# EAGLE board schematic_var2 (EAGLE 6.4)
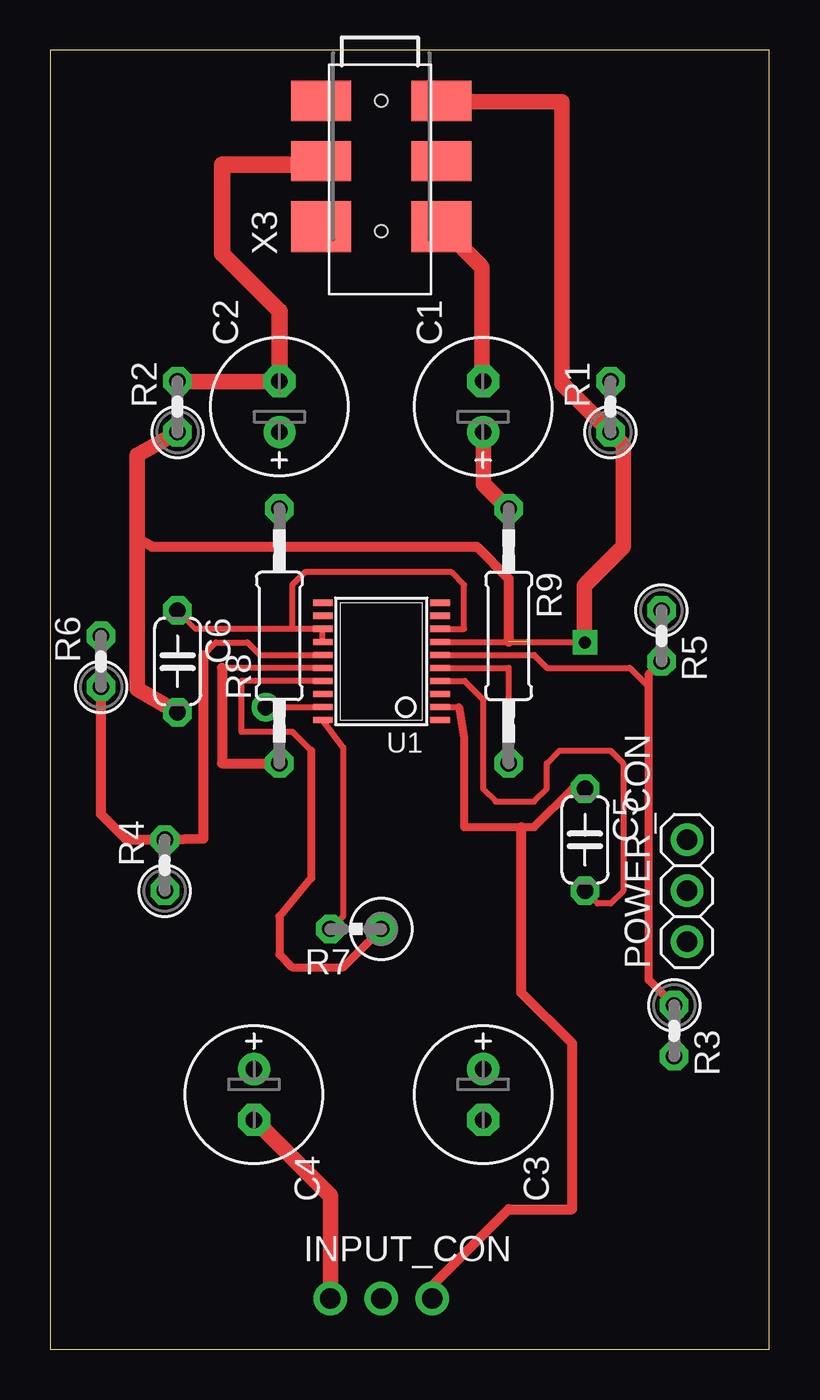
[diagram p0: board, top side]
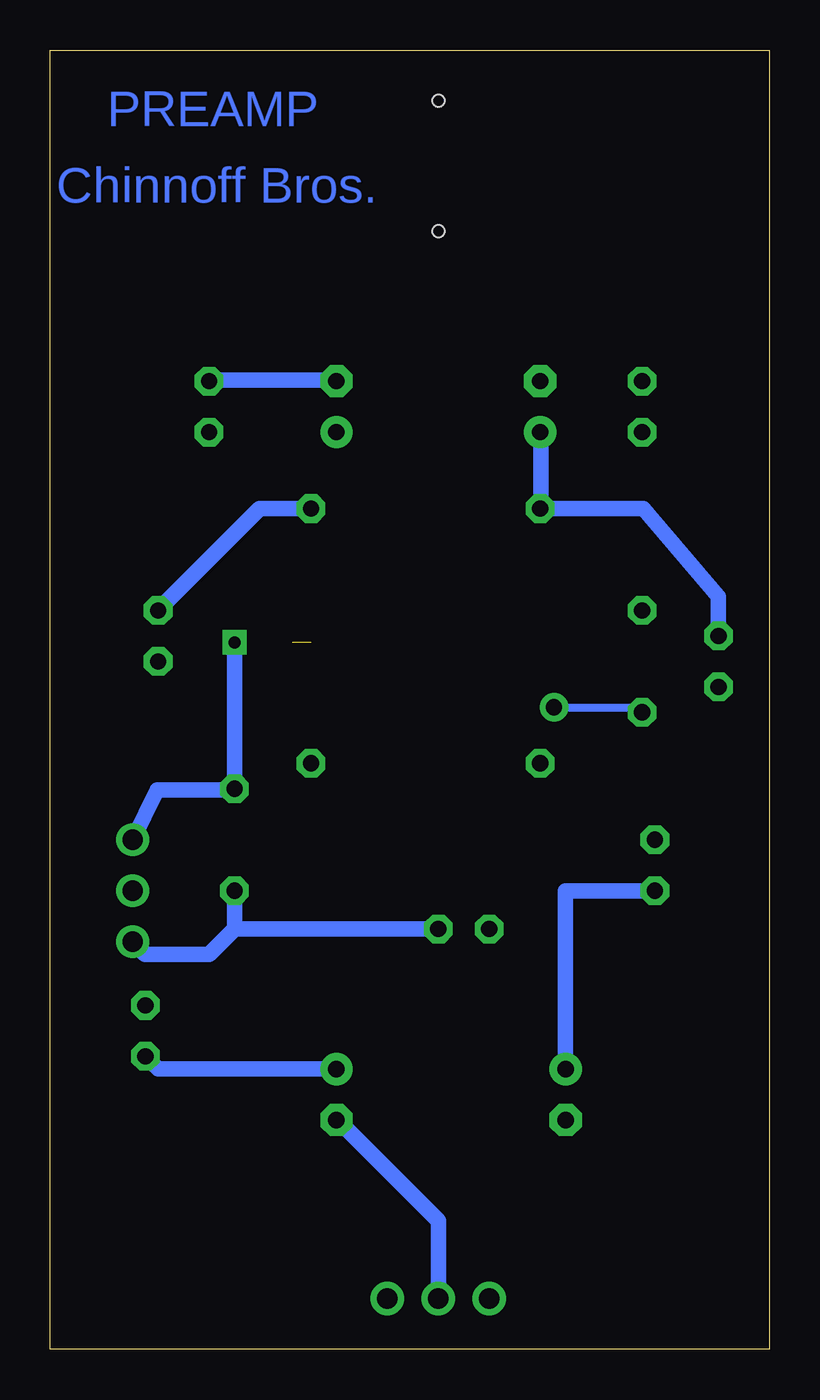
[diagram p1: board, bottom side, seen from below]

Size 35.87 x 64.76 mm. Coordinates in mm from the lower left corner, seen from the top.
Outline: 0,0 35.87,0 35.87,64.76 0,64.76 0,0
Copper layers (1*16): Top 0.035mm / dielectric 1.5mm / Bottom 0.035mm
Design rules "default *": minimum track width 12mil, minimum drill 32mil, track to track 12mil, track to pad 12mil, pad to pad 12mil, via to via 12mil, smd to smd 8mil, copper to edge 40mil, drill to drill 40mil, minimum pad ring 12mil, minimum via ring 12mil, stop-mask expansion 4mil, vias tented up to drill 0mil, thermal gap 20mil

## Footprints (pad centres in the part's own frame; a part is rotated, then mirrored left to right if it is on the bottom)
E2,5-7 = drill 0.813 pad 1.6: + -1.27,0 | drill 0.813 pad 1.6 octagon: - 1.27,0
C050-024X044 = drill 0.813 octagon: 1 -2.54,0; 2 2.54,0
1X03-CLEANBIG = drill 1.016 pad 1.676: 1 -2.54,0; 2 0,0; 3 2.54,0
1X03 = drill 1.016: 1 -2.54,0; 2 0,0; 3 2.54,0
0207/2V = drill 0.813 octagon: 1 -1.27,0; 2 1.27,0
0309V = drill 0.813 octagon: 1 -1.27,0; 2 1.27,0
0207/12 = drill 0.813 octagon: 1 -6.35,0; 2 6.35,0
TSSOP20 = smd 0.305 x 0.991: +IN_A 1.625,-2.918; +IN_B 1.625,2.918; +OUT_A -1.625,-2.918; +OUT_B -1.625,2.918; -IN_A 0.325,-2.918; -IN_B 0.325,2.918; -OUT_A -0.325,-2.918; -OUT_B -0.325,2.918; BYPASS 0.975,2.918; GND -2.275,-2.918; GND2 0.975,-2.918; GND3 -2.275,2.918; HP_IN -2.925,2.918; NC1 2.275,-2.918; NC2 2.925,-2.918; NC3 2.275,2.918; NC4 2.925,2.918; SHUTDOWN -2.925,-2.918; VDD -0.975,-2.918; VDD2 -0.975,2.918
1501_03 = smd 3 x 2: 1 3,0; 2 3,-3; 11 -3,0; 22 -3,-3 | smd 3 x 2.54: 3 3,-6.27; 33 -3,-6.27 | hole 0.6: 0,0; 0,-6.5

## Placement (x,y rotation side)
C1  [E2,5-7]  21.59,46.99 90 top
C2  [E2,5-7]  11.43,46.99 90 top
C3  [E2,5-7]  21.59,12.7 270 top
C4  [E2,5-7]  10.16,12.7 270 top
C5  [C050-024X044]  26.67,25.4 270 top
C6  [C050-024X044]  6.35,34.29 270 top
INPUT_CON  [1X03-CLEANBIG]  16.51,2.54 0 top
POWER_CON  [1X03]  31.75,22.86 90 top
R1  [0207/2V]  27.94,46.99 90 top
R2  [0207/2V]  6.35,46.99 90 top
R3  [0207/2V]  31.12,15.88 270 top
R4  [0207/2V]  5.72,24.13 90 top
R5  [0207/2V]  30.48,35.56 270 top
R6  [0207/2V]  2.54,34.29 90 top
R7  [0309V]  15.24,20.95 180 top
R8  [0207/12]  11.43,35.56 90 top
R9  [0207/12]  22.86,35.56 270 top
U1  LM4863  [TSSOP20]  16.51,34.29 90 top
X3  1501_03  [1501_03]  16.51,62.23 0 top

## Library data of the parts
C1-C4 = rcl
C5 C6 R1-R9 = resistor
INPUT_CON POWER_CON = adafruit
U1 = mylib
X3 = mylib; OC_FARNELL: 1200127; OC_NEWARK: unknown

## Nets
+5V: C5.2 POWER_CON.1 R7.1 U1.VDD U1.VDD2
GND: C5.1 C6.2 INPUT_CON.3 POWER_CON.3 R1.1 R2.1 U1.GND U1.GND2 U1.GND3 X3.1
INPUT_LEFT: C3.- INPUT_CON.2
INPUT_RIGHT: C4.- INPUT_CON.1
N$1: C2.+ R6.2 R8.2
N$2: C1.+ R5.1 R9.1
N$3: C3.+ R3.2
N$4: R3.1 R5.2 U1.-IN_A
N$5: R4.2 R6.1 U1.-IN_B
N$6: C4.+ R4.1
N$7: C6.1 U1.+IN_A U1.+IN_B U1.BYPASS
N$8: R7.2 U1.HP_IN
N$9: R8.1 U1.-OUT_B
N$10: R9.2 U1.-OUT_A
OUT_LEFT: C1.- R1.2 X3.3
OUT_RIGHT: C2.- R2.2 X3.22

## Tracks (layer width: path | path; a pad name or v marks a point on that pad's centre or on a via)
+5V
  Top 0.254: 13.54,33.3 U1.VDD2
  Top 0.305: U1.VDD2 9.52,33.31 9.52,30.8 12.07,30.8 13.02,29.84 | U1.VDD 20.66,33.31 21.59,32.38 21.59,27.94 22.23,27.3 24.13,27.3 24.77,27.94 24.77,29.21 25.4,29.84 27.94,29.84 28.57,29.21 28.57,22.86 27.94,22.23 27.3,22.23 C5.2
  Top 0.406: 13.02,29.84 13.02,23.5 11.43,21.59 11.43,19.68 12.07,19.05 14.61,19.05 R7.1
  Bottom 0.762: C5.2 26.67,20.95 | 26.67,20.95 27.94,19.68 31.12,19.68 POWER_CON.1 | 26.67,20.95 R7.1
GND  (via drill 0.6, 0.81)  (1 unrouted)
  Top 0.254: 19.56,62.18 X3.1 | 13.54,32 U1.GND3 | 6.37,45.72 R2.1 | INPUT_CON.3 19.05,3.17
  Top 0.305: U1.GND 20.37,32.02 | 13.54,32 v10.74,32 | 23.79,35.27 23.81,35.24 | U1.GND2 22.86,35.27 26.65,35.27 v26.67,35.24
  Top 0.406: C5.1 26.04,27.94 24.13,26.04 23.5,26.04 20.64,26.04 20.64,30.48 20.37,32.02
  Top 0.508: 4.34,40.41 5.08,40.01 20.32,40.01 21.27,40.01 22.86,38.42 22.86,35.27 | 19.05,3.17 22.86,6.99 26.04,6.99 26.04,15.24 23.5,17.78 23.5,26.04
  Top 0.762: 19.56,62.18 25.53,62.18 25.53,48.13 R1.1 28.57,45.09 28.57,40.01 27.3,38.73 26.65,38.08 26.65,35.27 | 6.37,45.72 4.34,44.58 4.34,40.41 4.34,32.92 C6.2
  Bottom 0.254: 6.37,31.77 C6.2 | 26.72,27.89 C5.1
  Bottom 0.406: v10.74,32 6.35,32 C6.2
  Bottom 0.762: POWER_CON.3 30.53,27.89 26.72,27.89 | v26.67,35.24 C5.1
INPUT_LEFT
  Bottom 0.254: 21.54,11.43 C3.-
  Bottom 0.762: 21.54,11.43 16.51,6.4 INPUT_CON.2
INPUT_RIGHT
  Top 0.254: 10.18,11.43 C4.-
  Top 0.762: 10.18,11.43 13.97,7.64 INPUT_CON.1
N$1
  Bottom 0.254: 11.41,45.72 C2.+ | 11.41,41.99 R8.2
  Bottom 0.762: R8.2 6.3,41.91 2.54,37.52 R6.2 | 11.41,41.99 11.41,45.72
N$2
  Top 0.254: 22.84,41.91 R9.1 | 21.62,45.72 C1.+
  Top 0.762: 22.84,41.91 21.62,43.13 21.62,45.72
  Bottom 0.254: 30.45,36.88 R5.1
  Bottom 0.762: 30.45,36.88 25.43,41.91 R9.1
N$3
  Bottom 0.762: C3.+ 30.48,13.97 R3.2
N$4
  Top 0.254: 19.41,34.59 U1.-IN_A
  Top 0.305: U1.-IN_A 24.12,34.62 24.77,33.97 28.89,33.97 29.84,33.02 | 30.16,33.97 R5.2
  Top 0.406: R3.1 29.84,18.41 29.84,33.02 29.84,33.66 R5.2
N$5
  Top 0.254: 13.54,34.59 U1.-IN_B
  Top 0.305: 7.65,34.59 7.62,34.59 8.25,35.24 9.84,35.24 10.48,34.61 13.59,34.61 U1.-IN_B
  Top 0.508: 7.65,34.59 7.65,25.45 R4.2 3.81,25.4 2.54,26.67 R6.1
N$6
  Bottom 0.254: 10.18,14.02 C4.+
  Bottom 0.762: 10.18,14.02 10.18,22.86 R4.1
N$7
  Top 0.254: 7.26,35.91 C6.1
  Top 0.305: 12.07,35.91 U1.+IN_B U1.BYPASS | 12.07,35.91 7.26,35.91 | U1.+IN_A 20.64,35.91 20.64,38.1 20,38.73 12.7,38.73 12.07,38.1 12.07,35.91
N$8
  Top 0.254: 13.61,31.32 U1.HP_IN
  Top 0.305: 13.61,31.32 14.61,30.01 14.61,21.59 R7.2
N$9
  Top 0.305: U1.-OUT_B 8.57,33.97
  Top 0.508: 8.57,33.97 8.57,29.21 R8.1
N$10
  Top 0.254: U1.-OUT_A 19.43,33.97
  Top 0.305: 19.43,33.97 22.86,33.97 R9.2
OUT_LEFT
  Top 0.254: 19.56,55.93 X3.3 | 21.54,48.31 C1.-
  Top 0.762: 19.56,55.93 21.54,53.95 21.54,48.31
  Bottom 0.254: 27.94,48.31 R1.2 | 21.62,48.31 C1.-
  Bottom 0.762: 21.62,48.31 27.94,48.31
OUT_RIGHT
  Top 0.254: 6.37,48.23 R2.2 | 11.33,48.23 C2.-
  Top 0.762: 11.33,48.23 6.37,48.23
  Top 0.813: C2.- 11.43,51.75 8.57,54.61 8.57,59.05 13.51,59.05 X3.22

## Text on the board
Bottom: PREAMP | Chinnoff Bros.